# EAGLE board Teensy3 (EAGLE 6.4)
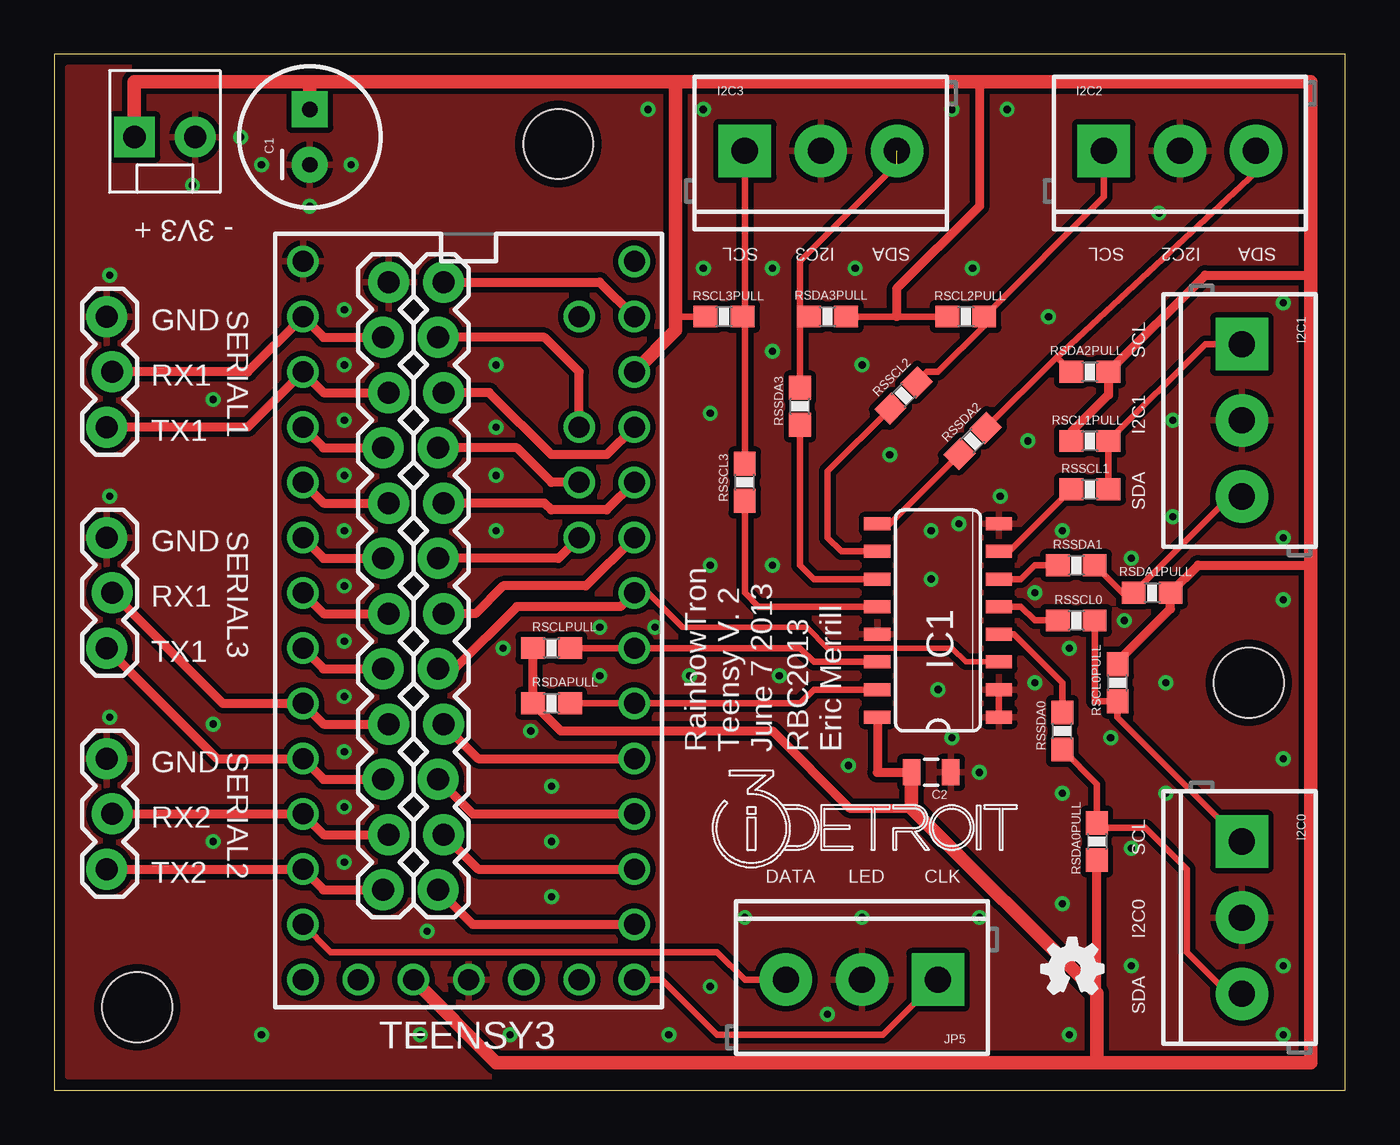
[diagram p0: board, top side]
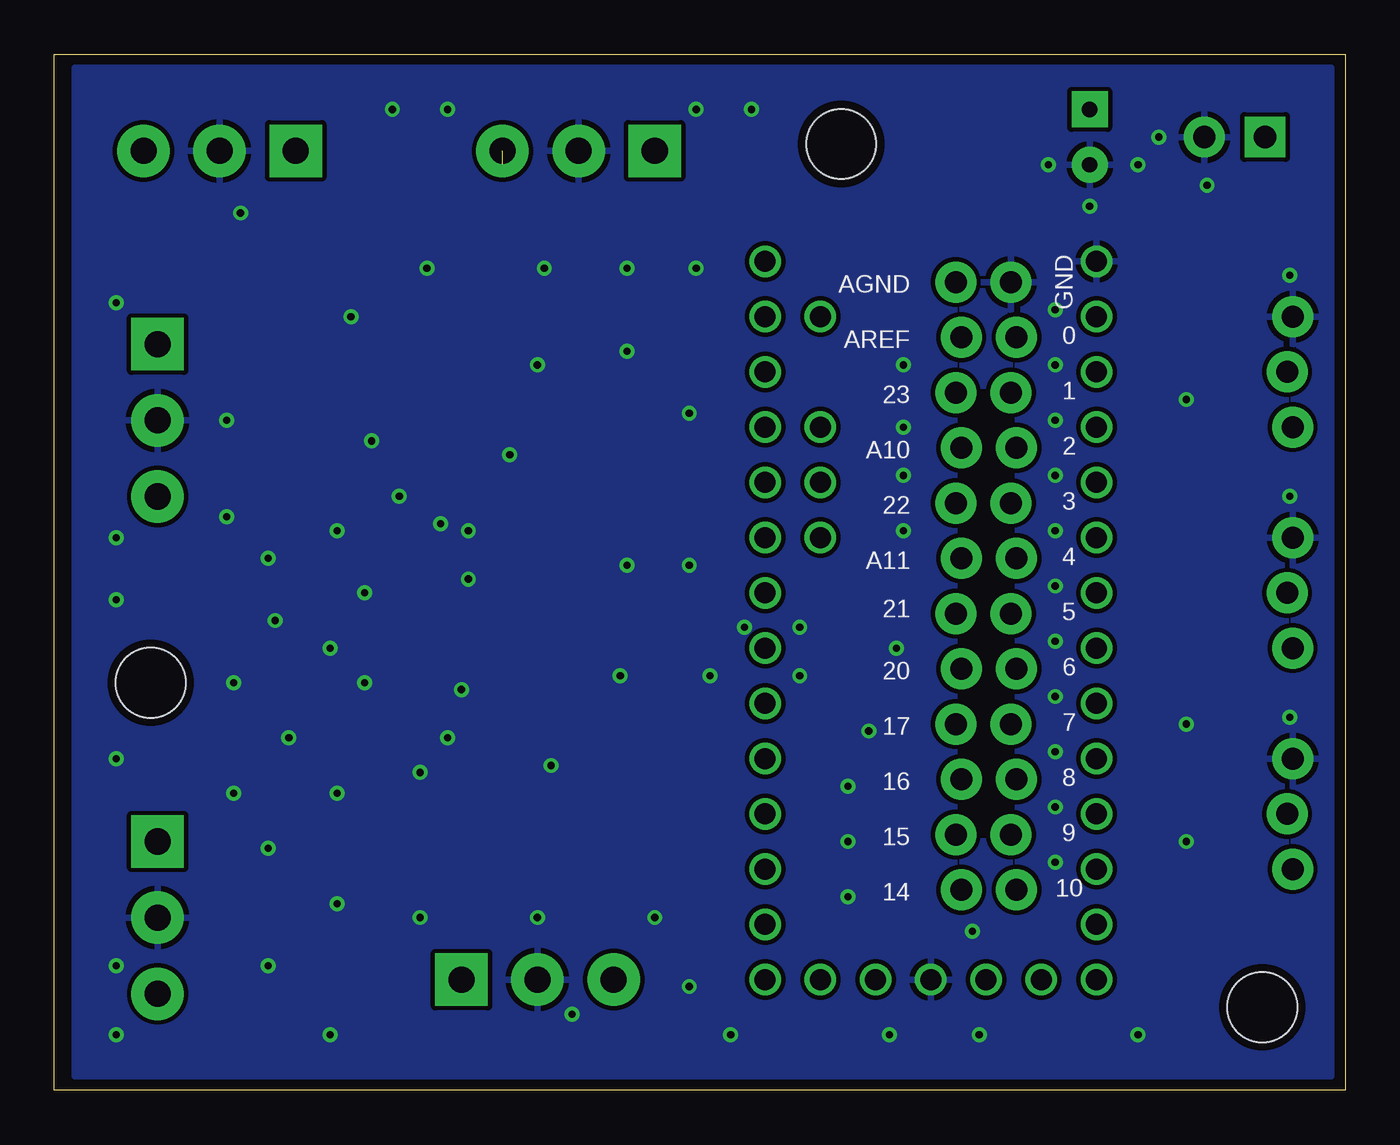
[diagram p1: board, bottom side, seen from below]

Size 59.36 x 47.62 mm. Coordinates in mm from the lower left corner, seen from the top.
Outline: 0,0 59.36,0 59.36,47.62 0,47.62 0,0
Copper layers (1*16): Top 0.0356mm / dielectric 1.5011mm / Bottom 0.0356mm
Design rules "OSHPark *": minimum track width 6mil, minimum drill 13mil, track to track 8mil, track to pad 8mil, pad to pad 8mil, via to via 8mil, smd to smd 6mil, copper to edge 15mil, drill to drill 6mil, minimum pad ring 7mil, minimum via ring 7mil, stop-mask expansion 4mil, vias tented up to drill 20mil, thermal gap 10mil
Holes 3.2 mm at 54.93,18.73 23.18,43.5 3.81,3.81
tKeepout: area 51.1,14.9 to 58.7,22.5; area 19.4,39.7 to 27,47.3; area 0,0 to 7.6,7.6

## Footprints (pad centres in the part's own frame; a part is rotated, then mirrored left to right if it is on the bottom)
CPOL-RADIAL-100UF-25V = drill 0.7 pad 1.651 square: 1 1.27,0 | drill 0.7 pad 1.651: 2 -1.27,0
0805 = smd 0.8 x 1.2: 1 -0.9,0; 2 0.9,0
SCREWTERMINAL-3.5MM-3 = drill 1.2 pad 2.413 square: 1 0,0 | drill 1.2 pad 2.413: 2 3.5,0; 3 7,0
SO16 = smd 0.6 x 1.2: 1 -4.445,-2.8; 2 -3.175,-2.8; 3 -1.905,-2.8; 4 -0.635,-2.8; 5 0.635,-2.8; 6 1.905,-2.8; 7 3.175,-2.8; 8 4.445,-2.8; 9 4.445,2.8; 10 3.175,2.8; 11 1.905,2.8; 12 0.635,2.8; 13 -0.635,2.8; 14 -1.905,2.8; 15 -3.175,2.8; 16 -4.445,2.8
1X12_LOCK = drill 1.016 pad 1.88: 1 0,0.127; 2 2.54,-0.127; 3 5.08,0.127; 4 7.62,-0.127; 5 10.16,0.127; 6 12.7,-0.127; 7 15.24,0.127; 8 17.78,-0.127; 9 20.32,0.127; 10 22.86,-0.127; 11 25.4,0.127; 12 27.94,-0.127
MOLEX-1X2_LOCK = drill 1.016 pad 1.88 square: 1 -0.127,0 | drill 1.016 pad 1.88: 2 2.667,0
0603-RES = smd 1.1 x 1: 1 -0.85,0; 2 0.85,0
1X03_LOCK = drill 1.016 pad 1.88: 1 0,0.127; 2 2.54,-0.127; 3 5.08,0.127
TEENSY_3.0+4 = drill 0.965: 0 -7.62,13.97; 1 -7.62,11.43; 2 -7.62,8.89; 3 -7.62,6.35; 3.3V 7.62,11.43; 3.3V1 -2.54,-16.51; 4 -7.62,3.81; 5 -7.62,1.27; 6 -7.62,-1.27; 7 -7.62,-3.81; 8 -7.62,-6.35; 9 -7.62,-8.89; 10 -7.62,-11.43; 11 -7.62,-13.97; 12 -7.62,-16.51; 13 7.62,-16.51; 14/A0 7.62,-13.97; 15/A1 7.62,-11.43; 16/A2 7.62,-8.89; 17/A3 7.62,-6.35; 18/A4 7.62,-3.81; 19/A5 7.62,-1.27; 20/A6 7.62,1.27; 21/A7 7.62,3.81; 22/A8 7.62,6.35; 23/A9 7.62,8.89; A10 5.08,6.35; A11 5.08,3.81; AGND 7.62,13.97; AREF 5.08,8.89; GND -7.62,16.51; GND1 0,-16.51; PGM 2.54,-16.51; RESET 5.08,-16.51; VBAT -5.08,-16.51; VIN 7.62,16.51; VUSB 5.08,13.97

## Placement (x,y rotation side)
C1  [CPOL-RADIAL-100UF-25V]  11.75,43.81 90 top
C2  .1uF  [0805]  40.32,14.61 180 top
I2C0  [SCREWTERMINAL-3.5MM-3]  54.61,11.43 270 top
I2C1  [SCREWTERMINAL-3.5MM-3]  54.61,34.29 270 top
I2C2  [SCREWTERMINAL-3.5MM-3]  48.26,43.18 0 top
I2C3  [SCREWTERMINAL-3.5MM-3]  31.75,43.18 0 top
IC1  [SO16]  40.64,21.59 90 top
JP1  [1X12_LOCK]  15.24,9.21 90 top
JP2  [1X12_LOCK]  17.78,9.21 90 top
JP5  [SCREWTERMINAL-3.5MM-3]  40.64,5.08 180 top
PWR  [MOLEX-1X2_LOCK]  3.81,43.81 0 top
RSCL0PULL  3.3k  [0603-RES]  48.9,18.73 90 top
RSCL1PULL  3.3k  [0603-RES]  47.62,29.84 180 top
RSCL2PULL  3.3k  [0603-RES]  41.91,35.56 180 top
RSCL3PULL  3.3k  [0603-RES]  30.8,35.56 180 top
RSCLPULL  3.3k  [0603-RES]  22.86,20.32 0 top
RSDA0PULL  3.3k  [0603-RES]  47.94,11.43 270 top
RSDA1PULL  3.3k  [0603-RES]  50.48,22.86 0 top
RSDA2PULL  3.3k  [0603-RES]  47.62,33.02 0 top
RSDA3PULL  3.3k  [0603-RES]  35.56,35.56 0 top
RSDAPULL  3.3k  [0603-RES]  22.86,17.78 0 top
RSSCL0  200  [0603-RES]  46.99,21.59 180 top
RSSCL1  200  [0603-RES]  47.62,27.62 180 top
RSSCL2  200  [0603-RES]  39.05,31.94 45 top
RSSCL3  200  [0603-RES]  31.75,27.94 90 top
RSSDA0  200  [0603-RES]  46.35,16.51 90 top
RSSDA1  200  [0603-RES]  46.99,24.13 180 top
RSSDA2  200  [0603-RES]  42.23,29.84 45 top
RSSDA3  200  [0603-RES]  34.29,31.43 90 top
SERIAL1  [1X03_LOCK]  2.54,30.48 90 top
SERIAL2  [1X03_LOCK]  2.54,10.16 90 top
SERIAL3  [1X03_LOCK]  2.54,20.32 90 top
TEENSY3  [TEENSY_3.0+4]  19.05,21.59 0 top
U$1  [I3DETROITVEC14MM]  30.16,10.16 0 top
U$2  [OSHW_FILLX100_NOTEXT]  45.4,4.45 0 top

## Library data of the parts
C1 RSCL0PULL RSCL1PULL RSCL2PULL RSCL3PULL RSCLPULL RSDA0PULL RSDA1PULL RSDA2PULL RSDA3PULL RSDAPULL RSSCL0 RSSCL1-RSSCL3 RSSDA0 RSSDA1-RSSDA3 = SparkFun-Passives
C2 = SparkFun-Capacitors
I2C0 I2C1-I2C3 JP1 JP2 JP5 PWR SERIAL1-SERIAL3 = SparkFun-Connectors
IC1 U$1 = personal
TEENSY3 = Teensy3.0
U$2 = ohw-logo

## Nets
GND: C1.2 C2.1 I2C0.2 I2C1.2 I2C2.2 I2C3.2 IC1.1 IC1.2 IC1.8 IC1.13 JP1.12 JP5.2 PWR.2 SERIAL1.3 SERIAL2.3 SERIAL3.3 TEENSY3.GND TEENSY3.GND1
N$1: IC1.12 RSSCL3.1
N$2: IC1.11 RSSDA3.1
N$3: IC1.10 RSSCL2.1
N$4: JP1.1 SERIAL2.1 TEENSY3.10
N$5: IC1.9 RSSDA2.1
N$6: IC1.7 RSSCL1.2
N$7: IC1.6 RSSDA1.2
N$8: IC1.5 RSSCL0.2
N$9: IC1.4 RSSDA0.2
N$10: JP1.2 SERIAL2.2 TEENSY3.9
N$11: JP1.4 SERIAL3.2 TEENSY3.7
N$12: JP1.3 SERIAL3.1 TEENSY3.8
N$13: IC1.3 JP2.5 TEENSY3.20/A6
N$14: JP5.3 TEENSY3.11
N$15: JP1.5 TEENSY3.6
N$16: JP1.6 TEENSY3.5
N$17: JP1.7 TEENSY3.4
N$18: JP1.8 TEENSY3.3
N$19: JP1.9 TEENSY3.2
N$20: JP2.1 TEENSY3.14/A0
N$21: JP2.2 TEENSY3.15/A1
N$22: JP5.1 TEENSY3.13
N$23: JP2.3 TEENSY3.16/A2
N$24: JP2.4 TEENSY3.17/A3
N$25: JP2.6 TEENSY3.21/A7
N$26: JP2.7 TEENSY3.A11
N$27: JP2.8 TEENSY3.22/A8
N$28: JP2.9 TEENSY3.A10
N$29: JP2.10 TEENSY3.23/A9
N$30: JP2.12 TEENSY3.AGND
N$31: JP2.11 TEENSY3.AREF
RX1: JP1.11 SERIAL1.2 TEENSY3.0
SCL: IC1.14 RSCLPULL.2 TEENSY3.19/A5
SCL0: I2C0.1 RSCL0PULL.1 RSSCL0.1
SCL1: I2C1.1 RSCL1PULL.1 RSSCL1.1
SCL2: I2C2.1 RSCL2PULL.1 RSSCL2.2
SCL3: I2C3.1 RSCL3PULL.1 RSSCL3.2
SDA: IC1.15 RSDAPULL.2 TEENSY3.18/A4
SDA0: I2C0.3 RSDA0PULL.1 RSSDA0.1
SDA1: I2C1.3 RSDA1PULL.1 RSSDA1.1
SDA2: I2C2.3 RSDA2PULL.1 RSSDA2.2
SDA3: I2C3.3 RSDA3PULL.1 RSSDA3.2
TX1: JP1.10 SERIAL1.1 TEENSY3.1
VBAT: TEENSY3.VBAT
VCC: C1.1 C2.2 IC1.16 PWR.1 RSCL0PULL.2 RSCL1PULL.2 RSCL2PULL.2 RSCL3PULL.2 RSCLPULL.1 RSDA0PULL.2 RSDA1PULL.2 RSDA2PULL.2 RSDA3PULL.2 RSDAPULL.1 TEENSY3.3.3V TEENSY3.3.3V1
VIN: TEENSY3.VIN
VUSB: TEENSY3.VUSB

## Tracks (layer width: path | path; a pad name or v marks a point on that pad's centre or on a via)
GND  (via drill 0.33)
  Top 0.305: IC1.1 IC1.2
  other vias: 51.12,18.73 33.02,33.97 33.02,37.78 36.83,37.78 33.02,24.13 25.08,19.05 29.21,19.05 33.34,19.05 40.32,23.5 42.55,14.61 46.35,8.57 51.12,13.65 46.35,13.65 49.53,24.45 44.77,29.84 38.42,29.21 37.15,33.34 42.23,37.78 45.72,35.56 50.8,40.32 40.32,25.72 40.64,18.41 49.53,11.11 56.52,15.24 45.09,22.86 56.52,22.54 43.81,45.09 29.84,37.78 30.16,31.11 30.16,24.13 46.35,25.72 45.09,18.73 46.67,20.32 48.58,16.19 49.53,5.71 51.44,30.8 51.44,26.35 56.52,36.2 56.52,5.71 2.54,37.47 6.35,41.59 8.57,43.81 9.53,42.55 11.75,40.64 13.65,42.55 2.54,27.3 2.54,17.14 9.53,2.54 16.83,2.54 20.95,2.54 17.14,7.3 22.86,8.89 22.86,11.43 22.86,13.97 20.64,20.32 20.32,25.72 20.32,28.26 20.32,30.48 20.32,33.34 27.3,45.09 29.84,45.09 41.27,45.09 56.52,25.4 56.52,2.54 46.67,2.54 7.3,11.43 7.3,16.83 7.3,31.75 36.51,14.92 49.21,21.59 13.34,33.34 13.34,30.8 13.34,28.26 13.34,25.72 13.34,23.18 13.34,20.64 13.34,18.1 13.34,15.56 13.34,13.02 13.34,10.48 13.34,35.88 30.16,4.76 28.26,2.54 35.56,3.49 31.75,7.94 42.55,7.94 37.15,7.94 43.5,27.3 41.59,26.04 41.27,16.19 21.91,16.51 27.62,21.27 25.08,21.27
  pour Bottom: 0.64,46.99 58.42,46.99 58.42,0.64 0.64,0.64
  pour Top (isolate 0.254): 0.64,46.99 58.42,46.99 58.42,0.64 0.64,0.64
N$1
  Top 0.305: IC1.12 32.38,22.23 31.75,22.86 RSSCL3.1
N$2
  Top 0.305: IC1.11 34.92,23.5 34.29,24.13 RSSDA3.1
N$3
  Top 0.305: IC1.10 36.2,24.77 35.56,25.4 35.56,28.44 RSSCL2.1
N$4
  Top 0.406: SERIAL2.1 TEENSY3.10 12.38,9.21 JP1.1
N$5
  Top 0.305: RSSDA2.1 38.42,26.04 IC1.9
N$6
  Top 0.305: RSSCL1.2 43.92,24.77 IC1.7
N$7
  Top 0.305: IC1.6 44.45,23.5 45.09,24.13 RSSDA1.2
N$8
  Top 0.305: IC1.5 44.45,22.23 45.09,21.59 RSSCL0.2
N$9
  Top 0.305: IC1.4 44.13,20.95 46.35,18.73 RSSDA0.2
N$10
  Top 0.406: SERIAL2.2 TEENSY3.9 12.38,11.75 JP1.2
N$11
  Top 0.406: SERIAL3.2 7.75,17.78 TEENSY3.7 12.38,16.83 JP1.4
N$12
  Top 0.406: SERIAL3.1 7.49,15.24 TEENSY3.8 12.38,14.29 JP1.3
N$13
  Top 0.254: IC1.3 41.91,19.68 41.27,20.32 35.56,20.32 34.61,21.27 28.89,21.27 27.3,22.86 TEENSY3.20/A6
  Top 0.406: TEENSY3.20/A6 26.04,22.23 21.27,22.23 18.41,19.37 JP2.5
N$14
  Top 0.305: TEENSY3.11 12.7,6.35 30.48,6.35 31.75,5.08 JP5.3
N$15
  Top 0.406: TEENSY3.6 12.38,19.37 JP1.5
N$16
  Top 0.406: TEENSY3.5 12.38,21.91 JP1.6
N$17
  Top 0.406: TEENSY3.4 12.38,24.45 JP1.7
N$18
  Top 0.406: TEENSY3.3 12.38,26.99 JP1.8
N$19
  Top 0.406: TEENSY3.2 12.38,29.53 JP1.9
N$20
  Top 0.406: JP2.1 19.24,7.62 TEENSY3.14/A0
N$21
  Top 0.406: JP2.2 19.49,10.16 TEENSY3.15/A1
N$22
  Top 0.305: JP5.1 38.1,2.54 30.48,2.54 27.94,5.08 TEENSY3.13
N$23
  Top 0.406: JP2.3 19.24,12.7 TEENSY3.16/A2
N$24
  Top 0.406: JP2.4 19.49,15.24 TEENSY3.17/A3
N$25
  Top 0.406: TEENSY3.21/A7 24.45,23.18 20.64,23.18 19.37,21.91 JP2.6
N$26
  Top 0.406: TEENSY3.A11 23.18,24.45 JP2.7
N$27
  Top 0.406: TEENSY3.22/A8 25.4,26.67 22.86,26.67 22.54,26.99 JP2.8
N$28
  Top 0.406: TEENSY3.A10 22.86,27.94 21.27,29.53 JP2.9
N$29
  Top 0.406: TEENSY3.23/A9 25.4,29.21 22.86,29.21 20,32.07 JP2.10
N$30
  Top 0.406: JP2.12 25.08,37.15 TEENSY3.AGND
N$31
  Top 0.406: TEENSY3.AREF 24.13,33.02 22.54,34.61 JP2.11
RX1
  Top 0.406: SERIAL1.2 8.89,33.02 TEENSY3.0 12.38,34.61 JP1.11
SCL
  Top 0.305: IC1.14 34.92,19.68 34.29,20.32 TEENSY3.19/A5 RSCLPULL.2
SCL0
  Top 0.305: RSSCL0.1 47.84,17.88 RSCL0PULL.1 48.9,17.14 I2C0.1
SCL1
  Top 0.305: RSSCL1.1 RSCL1PULL.1 52.92,34.29 I2C1.1
SCL2
  Top 0.305: RSSCL2.2 40.14,33.02 40.64,33.02 42.76,35.14 RSCL2PULL.1 48.26,41.06 I2C2.1
SCL3
  Top 0.305: RSSCL3.2 31.75,35.46 RSCL3PULL.1 31.75,35.66 I2C3.1
SDA
  Top 0.305: IC1.15 34.92,18.41 34.29,17.78 TEENSY3.18/A4 RSDAPULL.2
SDA0
  Top 0.305: RSSDA0.1 47.94,14.07 RSDA0PULL.1 48.16,12.06 50.16,12.06 52.07,10.16 52.07,6.35 53.99,4.43 I2C0.3
SDA1
  Top 0.305: RSSDA1.1 49.11,22.86 RSDA1PULL.1 54.06,27.29 I2C1.3
SDA2
  Top 0.305: 46.05,33.64 55.26,42.19 I2C2.3 | RSDA2PULL.1 46.15,33.64 46.05,33.64 | 46.05,33.64 42.85,30.45 RSSDA2.2
SDA3  (1 unrouted)
  Top 0.305: 34.29,35.56 34.29,38.1 38.75,42.56 | RSDA3PULL.1 34.29,35.56 | 34.29,35.56 RSSDA3.2
TX1
  Top 0.406: SERIAL1.1 8.89,30.48 TEENSY3.1 12.38,32.07 JP1.10
VCC
  Top 0.305: RSDA3PULL.2 38.73,35.56 RSCL2PULL.2 | RSCL3PULL.2 28.57,35.56
  Top 0.406: 42.49,46.35 42.55,46.3 42.55,40.64 38.73,36.83 38.73,35.56 | 57.78,37.47 52.92,37.47 RSDA2PULL.2 48.48,31.96 46.77,30.27 RSCL1PULL.2 | RSCLPULL.1 RSDAPULL.1 23.28,16.51 33.02,16.51 36.56,12.96 39.42,12.96 | IC1.16 37.84,14.61 C2.2 | RSCL0PULL.2 48.9,19.68 51.33,22.12 RSDA1PULL.2 52.6,24.13 57.78,24.13 | 47.94,4.45 RSDA0PULL.2
  Top 0.61: 11.75,46.35 3.68,46.35 PWR.1 | 11.75,46.35 28.57,46.35 | 28.57,46.35 42.49,46.35 57.78,46.35 57.78,37.47 57.78,24.13 57.78,1.27 47.94,1.27 | C2.2 39.42,12.96 47.94,4.45 47.94,1.27 | C1.1 11.75,46.35 | TEENSY3.3.3V 28.57,34.92 28.57,35.56 28.57,46.35 | TEENSY3.3.3V1 20.32,1.27 47.94,1.27

## Text on the board
tNames: - 3V3 + | SCL | I2C3 | SDA | SCL | I2C2 | SDA | SERIAL1 | GND | SCL | RX1 | TX1 | I2C1 | SDA | SERIAL3 | GND | RX1 | TX1 | SERIAL2 | RainbowTron / Teensy V. 2 / June 7 2013 | RBC2013 / Eric Merrill | GND | RX2 | SCL | TX2 | DATA | LED | CLK | I2C0 | SDA
bNames: GND | AGND | AREF | 0 | 1 | 23 | A10 | 2 | 3 | 22 | A11 | 4 | 21 | 5 | 20 | 6 | 7 | 17 | 16 | 8 | 15 | 9 | 14 | 10